# Altium PCB TX_v5.PcbDoc
Units mil, origin at the board's own origin, x right, y up, seen from the top; angles counter-clockwise.
Board outline 1059 x 1910 mil, 2 copper layers (Top Layer, Bottom Layer); 94 components, 52 nets, 247 pads, 44 vias.
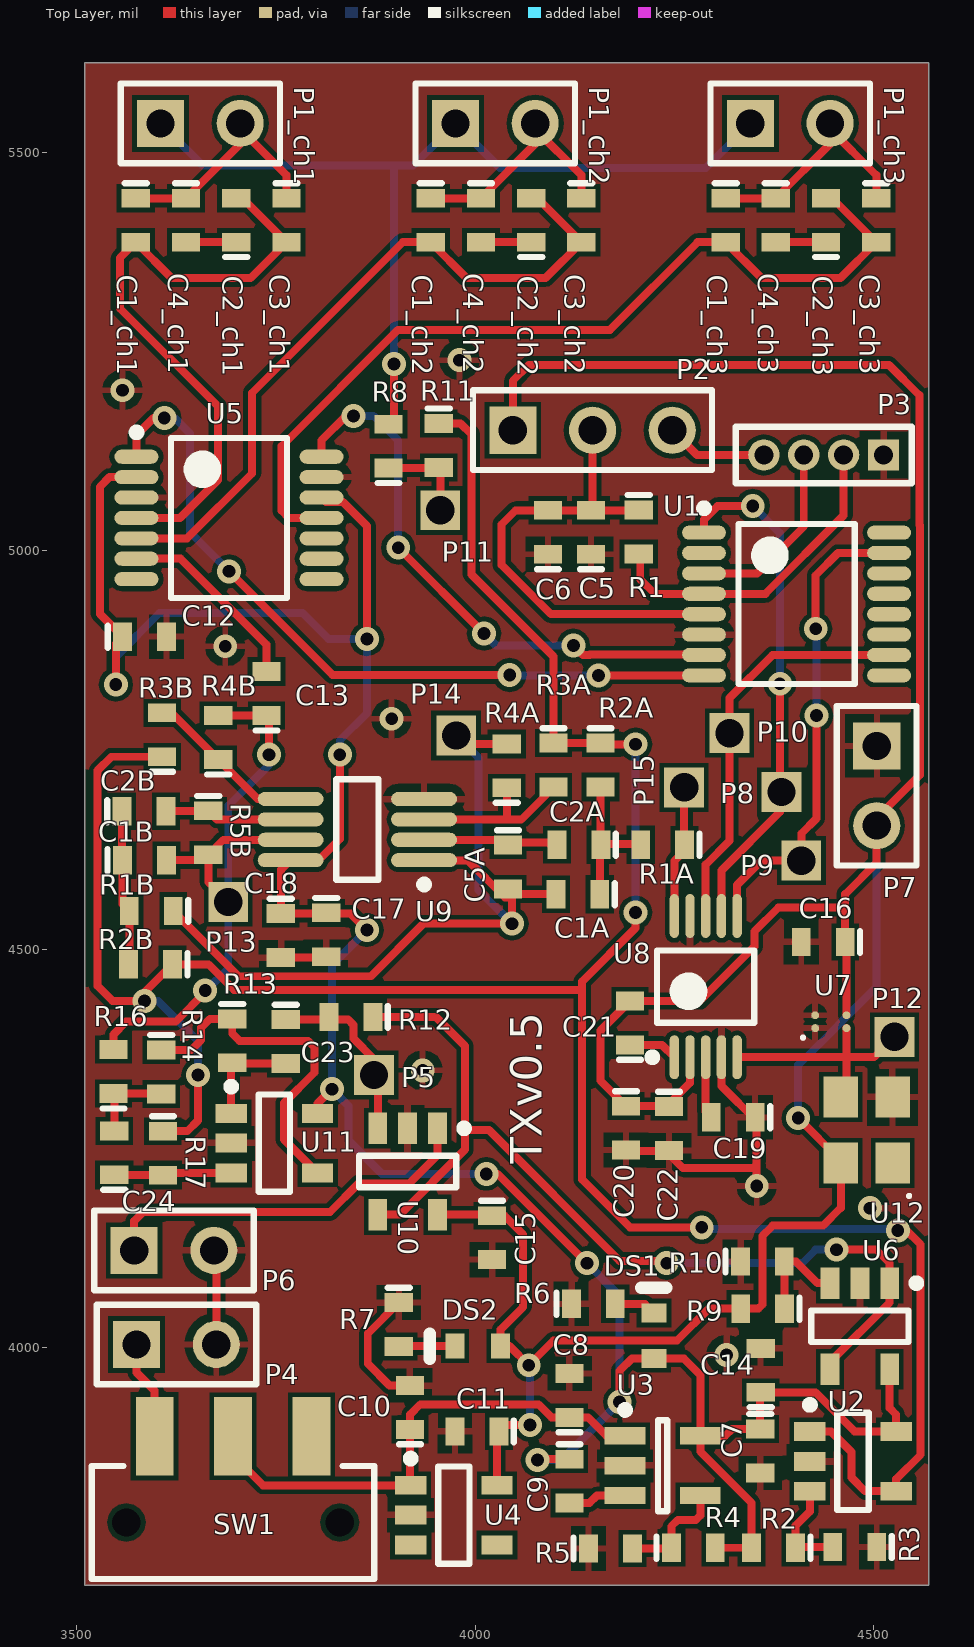
[diagram p0: Top Layer view]
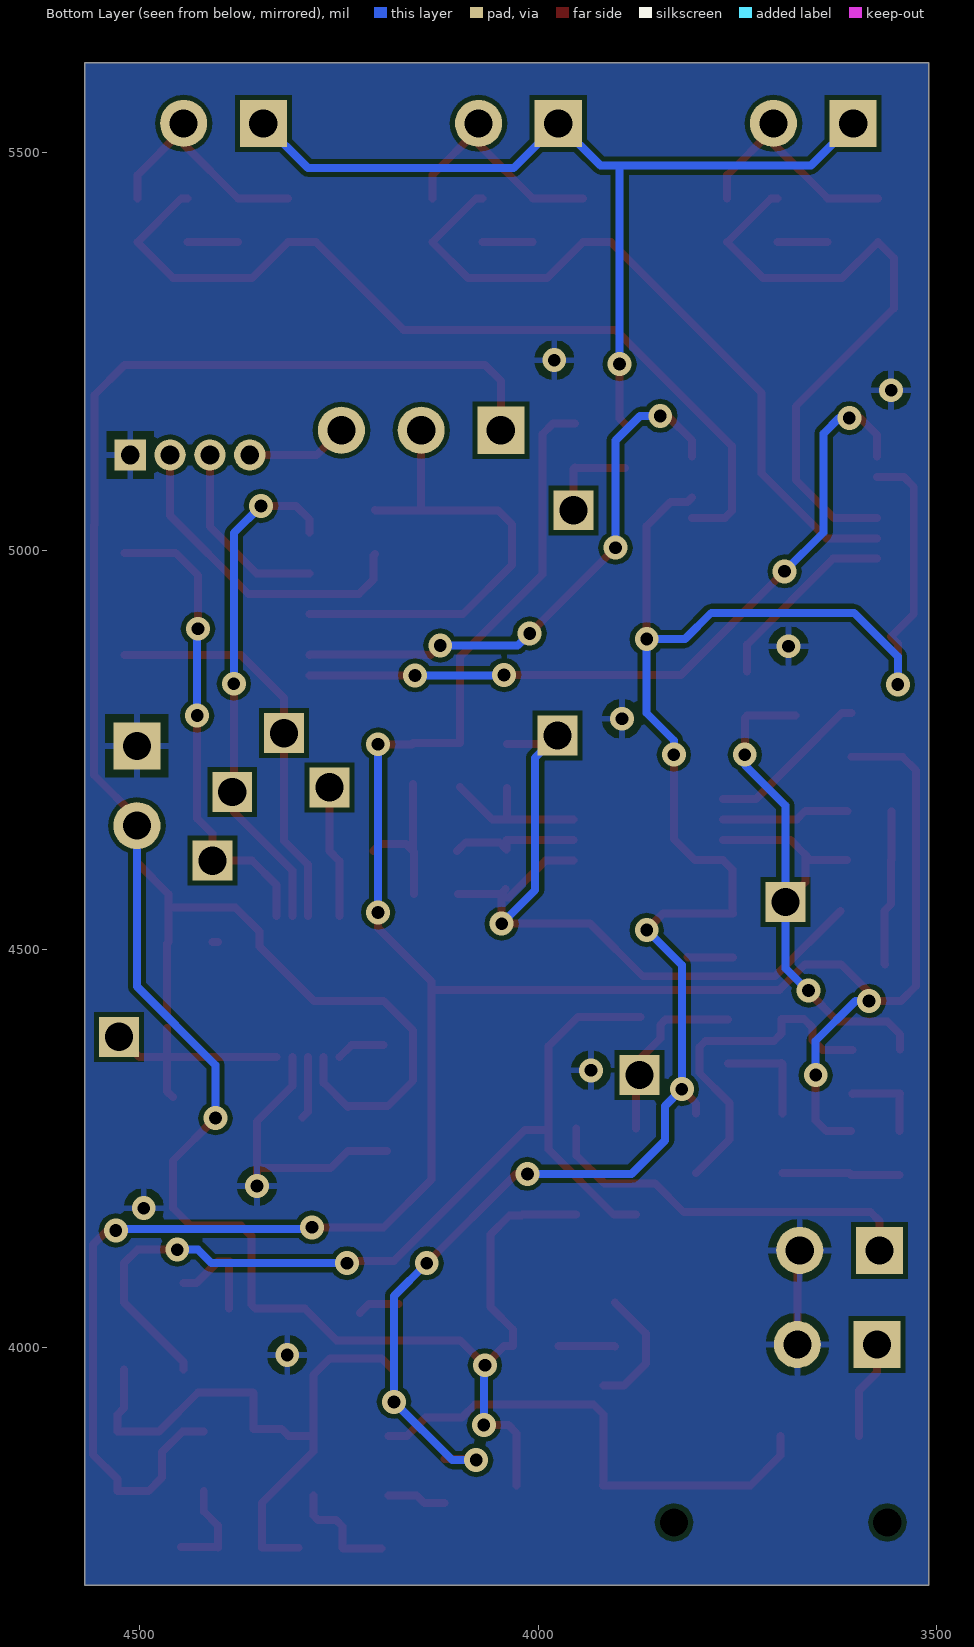
[diagram p1: Bottom Layer view, seen from below]

## Layer stack, top to bottom
Top Solder: solder mask 0.4, Solder Resist, Dk 3.5
Top Layer: signal copper 1.4
Dielectric 1: dielectric 12.6, FR-4, Dk 4.8
Bottom Layer: signal copper 1.4
Bottom Solder: solder mask 0.4, Solder Resist, Dk 3.5

## Board outline
3510,3702 4569,3702 4569,5612 3510,5612

## Design rules (kind name [scope] priority, off if disabled: settings)
Clearance "Clearance~Sunstone Circuits" [All] p1: gap=6 ignorepadtopadclearanceinfootprint=FALSE except(0: Arc-Hole Track-Hole SMDPad-Hole THPad-Hole Via-Hole Fill-Hole Poly-Hole Region-Hole Text-Hole; 5.5: SMDPad-SMDPad) // Sunstone Circuits Minimum Clearance Rule (Double Sided)
HoleSize "HoleSize~Sunstone Circuits" [All] p1: absolutevalues=TRUE maxlimit=251 minlimit=16 maxpercent=80.000 minpercent=20.000 // SSC Hole Size Rule For Single Sided & Double Sided Designs.
HoleSize Testpoint [All] p2: absolutevalues=TRUE maxlimit=100 minlimit=1 maxpercent=80.000 minpercent=20.000
HoleSize TestPointUsage [All] p3: absolutevalues=TRUE maxlimit=100 minlimit=1 maxpercent=80.000 minpercent=20.000
MinimumAnnularRing "MinimumAnnularRing~Sunstone Circuits" [All] p1: minimumring=7 // Sunstone Circuits Minimum Annular Ring (Double Sided)
MinimumSolderMaskSliver [All] p1: minsoldermaskwidth=4
PlaneClearance "PlaneClearance~Sunstone Circuits" [All] p1: clearance=12 // Sunstone Circuits Power Plane Clearance Rule (Double Sided)
PlaneConnect "PlaneConnect~Sunstone Circuits" [All] p1: planeconnectstyle=Relief reliefexpansion=10 reliefentries=4 reliefconductorwidth=8 reliefairgap=10 // Sunstone Circuits Power Plane Connect Rule (Double Sided)
PolygonConnect "PolygonConnect~Sunstone Circuits" [All] p1: connectstyle=Relief reliefconductorwidth=8 reliefentries=4 polygonreliefangle="90 Angle" airgapwidth=10 // Sunstone Circuits Polygon Connect Style (Double Sided)
RoomDefinition ch3 [InComponentClass('ch3')] p1: confinementstyle=ConfineIn formatcopy=TRUE lockcomponents=FALSE outline 4273,5603.95 4273,5287.95 4554,5287.95 4554,5603.95
RoomDefinition ch2 [InComponentClass('ch2')] p2: confinementstyle=ConfineIn formatcopy=TRUE lockcomponents=FALSE outline 3903,5603.95 3903,5287.95 4184,5287.95 4184,5603.95
RoomDefinition ch1 [InComponentClass('ch1')] p3: confinementstyle=ConfineIn formatcopy=TRUE lockcomponents=FALSE outline 3533,5603.95 3533,5287.95 3814,5287.95 3814,5603.95
RoutingVias "RoutingVias~Sunstone Circuits" [All] p1: holewidth=16 width=30 viastyle="Through Hole" minholewidth=16 minwidth=30 maxholewidth=20 maxwidth=40 // Sunstone Circuits Routing Vias Rule (Double Sided)
ShortCircuit "ShortCircuit~Sunstone Circuits" [All] p1: allowed=FALSE // Sunstone Circuits Short Circuit Rule~Do Not Allow (Double Sided)
SolderMaskExpansion "SolderMaskExpansion~Sunstone Circuits" [All] p1: expansion=3 // Sunstone Circuits Solder Mask Expansion Rule (Double Sided)
ViasUnderSMD "ViasUnderSMD~Sunstone Circuits" [All] p1: allowed=FALSE // Sunstone Circuits Vias Under SMD~Do Not Allow (Double Sided)
Width "Width~Sunstone Circuits" [All] p1: maxlimit=100 minlimit=6 preferedwidth=10 // Sunstone Circuits Minimum Width Rule (Double Sided)
25 further rules are at their usual default settings.

## Classes and differential pairs
component class U_phase_reference: C15 C23 C24 P5 P6 R12 R13 R14 R16 R17 U10 U11
component class U_signal_path: C1A C1B C2A C2B C5A C16 C17 C18 C19 C20 C21 C22 P7 P12 P13 P14 P15 R1A R1B R2A R2B R3A R3B R4A R4B R5B U7 U8 U9 U12
component class ch1: C1_ch1 C2_ch1 C3_ch1 C4_ch1 P1_ch1
component class ch2: C1_ch2 C2_ch2 C3_ch2 C4_ch2 P1_ch2
component class ch3: C1_ch3 C2_ch3 C3_ch3 C4_ch3 P1_ch3
channel class coil: ch1 ch2 ch3
component class U_coils: C12 C13 P11 R8 R11 U5
component class U_mcu: C5 C6 P2 P3 P8 P9 P10 R1 U1
component class U_power: C7 C8 C9 C10 C11 C14 DS1 DS2 P4 R2 R3 R4 R5 R6 R7 R9 R10 SW1 U2 U3 U4 U6

## Components (designator, comment, footprint, x,y, rotation, side; value= is the part's Value field where it differs from the comment)
C1_ch1 "Cap" 0603 3574,5414.46 r270 top value=100pF (schematic designator C1)
C1_ch2 "Cap" 0603 3944,5414.46 r270 top value=100pF (schematic designator C1)
C1_ch3 "Cap" 0603 4314,5414.46 r270 top value=100pF (schematic designator C1)
C1A "Cap" 0603 4128.56,4569 r180 top value=160pF
C1B "Cap" 0603 3584.88,4611.61 r0 top value=160pF
C2_ch1 "Cap" 0603 3700,5414.46 r90 top value=100pF (schematic designator C2)
C2_ch2 "Cap" 0603 4070,5414.46 r90 top value=100pF (schematic designator C2)
C2_ch3 "Cap" 0603 4440,5414.46 r90 top value=100pF (schematic designator C2)
C2A "Cap" 0603 4130,4631 r180 top value=160pF
C2B "Cap" 0603 3584.44,4673 r0 top value=160pF
C3_ch1 "Cap" 0603 3763,5414.44 r270 top value=100pF (schematic designator C3)
C3_ch2 "Cap" 0603 4133,5414.44 r270 top value=100pF (schematic designator C3)
C3_ch3 "Cap" 0603 4503,5414.44 r270 top value=100pF (schematic designator C3)
C4_ch1 "Cap" 0603 3637,5414.46 r270 top value=100pF (schematic designator C4)
C4_ch2 "Cap" 0603 4007,5414.46 r270 top value=100pF (schematic designator C4)
C4_ch3 "Cap" 0603 4377,5414.46 r270 top value=100pF (schematic designator C4)
C5 "Cap" 0603 4145,5023 r90 top value=10uF
C5A "Res" 0603 4041,4603 r270 top value=95.3k
C6 "Cap" 0603 4091,5023 r90 top value=.1uF
C7 "Cap" 0603 4357.35,3870.44 r270 top value=0.1uF
C8 "Cap" 0603 4118,3940 r90 top value=1uF
C9 "Cap" 0603 4118,3832.56 r270 top value=0.01uF
C10 "Cap" 0603 3918,3925 r90 top value=1uF
C11 "Cap" 0603 4002,3895 r180 top value=1uF
C12 "Cap" 0603 3585,4892 r0 top value=.1uF
C13 "Cap" 0603 3738,4820.56 r90 top value=DNC
C14 "Cap" 0603 4358,3971.56 r90 top value=0.1uF
C15 "Cap" 0603 4021,4138 r270 top value=.1uF
C16 "Cap" 0603 4436.44,4509 r180 top value=.01uF
C17 "Cap" 0603 3813,4518 r270 top value=10uF
C18 "Cap" 0603 3756,4517 r270 top value=0.1uF
C19 "Cap" 0603 4323.56,4289 r180 top value=100nF
C20 "Cap" 0603 4189,4275.44 r270 top value=10uF
C21 "Cap" 0603 4194,4407.44 r90 top value=.01uF
C22 "Cap" 0603 4243,4275 r270 top value=100nF
C23 "Cap" 0603 3762,4384 r270 top value=1uF
C24 "Cap" 0603 3547,4244.44 r90 top value=33pF
DS1 "TLMS1100-GS08" VISH-TLMX1100_V 4224,4015 r90 top
DS2 "TLMS1100-GS08" VISH-TLMX1100_V 4003,4002 r180 top
P1_ch1 "Header 2" HDR1X2 3605,5535.95 r0 top (schematic designator P1)
P1_ch2 "Header 2" HDR1X2 3975,5535.95 r0 top (schematic designator P1)
P1_ch3 "Header 2" HDR1X2 4345,5535.95 r0 top (schematic designator P1)
P2 "Header 3" HDR1X3 4047,5151 r0 top
P3 "MHDR1X4" MHDR1X4 4512,5120 r180 top
P4 "Header 2" HDR1X2 3575,4004 r0 top
P5 "Socket" socket 3873,4342 r180 top
P6 "Header 2" HDR1X2 3572,4122 r0 top
P7 "Header 2" HDR1X2 4503.56,4755 r270 top
P8 "Socket" socket 4384,4697 r0 top
P9 "Socket" socket 4408.88,4611 r0 top
P10 "Socket" socket 4319,4771 r90 top
P11 "Socket" socket 3956,5050.56 r0 top
P12 "Socket" socket 4526,4390 r90 top
P13 "Socket" socket 3690,4559 r90 top
P14 "Socket" socket 3976,4768 r90 top
P15 "Socket" socket 4262,4703 r90 top
R1 "Res" 0603 4205,5023.44 r270 top value=47k
R1A "Res" 0603 4235,4631 r180 top value=110k
R1B "Res" 0603 3593.44,4548 r180 top value=110k
R2 "Res" 0603 4374.14,3749 r180 top value=100k
R2A "Res" 0603 4157,4731 r270 top value=976
R2B "Res" 0603 3592.56,4481 r180 top value=976
R3 "Res" 0603 4476,3750 r180 top value=100k
R3A "Res" 0603 4098,4731 r270 top value=187
R3B "Res" 0603 3607,4768.93 r90 top value=0
R4 "Res" 0603 4273.44,3749 r0 top value=10k
R4A "Res" 0603 4039.5,4730 r90 top value=11.3k
R4B "Res" 0603 3677.51,4765.44 r90 top value=DNC
R5 "Res" 0603 4169.44,3748 r0 top value=2k
R5B "Res" 0603 3665,4646 r270 top value=97.6k
R6 "Res" 0603 4148,4055 r0 top value=590
R7 "Res" 0603 3904,4029 r270 top value=120
R8 "Res" 0603 3891,5131 r90 top value=0
R9 "Res" 0603 4360.44,4049 r180 top value=100k
R10 "Res" 0603 4360,4108 r0 top value=100k
R11 "Res" 0603 3954,5132 r270 top value=10
R12 "Res" 0603 3844,4415 r180 top value=10k
R13 "Res" 0603 3695,4385 r270 top value=10k
R14 "Res" 0603 3606,4346 r270 top value=10k
R16 "Res" 0603 3546,4346.44 r90 top value=150k
R17 "Res" 0603 3608,4244 r270 top value=100k
SW1 "JS102011SAQN" CKCP-JS102011SAQN-3_V 3696,3834.87 r0 top
U1 "MSP430FR2100 PW" TSOP65P640X120-16N 4403,4933 r0 top
U2 "ADA4622-1ARJZ" SOT95P280X145-5N 4473.87,3857.4 r0 top
U3 "LT1761ES5-BYP" LT-S5-5-TSOT-23_N 4235,3852 r0 top
U4 "TPS709" SOT95P280X145-5N 3973,3790 r0 top
U5 "ADG1604" TSSOP-14 3691,5041 r0 top
U6 "ADA4622-1ARJZ" SOT95P280X145-5N 4482.4,4026.87 r270 top
U7 "SIT8021AI-J4-18S-4.000000E" "SiT8021 - BGA4C100P2X2_154X84X60" 4446,4409 r0 top
U8 "AD9833" MSOP-10 4289,4453 r90 top
U9 "AD8616ARMZ" ADI-RM-8_M 3852,4650 r180 top
U10 "TLV3201-Q1" SOT95P280X145-5N 3915,4221 r270 top
U11 "ADA4622-1ARJZ" SOT95P280X145-5N 3747.87,4256.6 r0 top
U12 "ASE-4.000MHZ-LC-T" DFN165P250X120-4N 4491,4273 r180 top

## Footprints (in the part's own frame and the unit in brackets; to place one, negate y for a bottom-side part, rotate by r counter-clockwise, add the part's x,y. Pads: shape width x height; smd on the part's side, far side on the other; paste and mask are expansions set on the pad)
0603 [mm] "Surface Mount; Body 1.6 x 0.8 mm (LxW typ)"
  rect 0.6x0.9 smd: 1(-0.7,0) 2(0.7,0)
  silkscreen extent -1.17,-0.35 -1.17,0.35, body extent -0.8,-0.4 0.8,0.4, height 0.8
ADI-RM-8_M [mm] "SOP, 8-Leads, Body 3x3mm, Pitch 0.65mm, IPC Low Density"
  oval 2.1x0.45 smd: 1(-2.125,0.975) 2(-2.125,0.325) 3(-2.125,-0.325) 4(-2.125,-0.975) 5(2.125,-0.975) 6(2.125,-0.325) 7(2.125,0.325) 8(2.125,0.975)
  silkscreen extent -2.25,-1.6 0.67,1.87, body extent -1.6,-1.6 1.6,1.6, height 1.1
CKCP-JS102011SAQN-3_V [mm] "SMD, 3-Leads, Body 9x3.6mm, Pitch 2.5mm"
  rect 1.2x2.5 smd: 1(-2.5,1.375) 2(0,1.375) 3(2.5,1.375)
  round 0.6 hole 0.9 unplated: MH1(-3.4,-1.375) MH2(3.4,-1.375)
  silkscreen extent -4.5,-3.17 4.5,0.43, body extent -4.5,-5.18 4.5,2.37, height 3.52
DFN165P250X120-4N [mm] "DFN, 4-Leads, Body 3.20x2.50mm, Pitch 1.65mm, IPC Medium Density"
  rect 1.1x1.3 smd: 1(-0.825,1.05) 2(-0.825,-1.05) 3(0.825,-1.05) 4(0.825,1.05)
  silkscreen extent -1.4,2.05 -1.3,2.15, body extent -1.35,-1.7 1.35,1.7, height 1.2
HDR1X2 [mm] "Connector; Header; 2 Position"
  rect 1.5x1.5 hole 0.9: 1(0,0)
  round 1.5 hole 0.9: 2(2.54,0)
  silkscreen extent -1.27,-1.27 3.81,1.27
HDR1X3 [mm] "Connector; Header; 3 Position"
  rect 1.5x1.5 hole 0.9: 1(0,0)
  round 1.5 hole 0.9: 2(2.54,0) 3(5.08,0)
  silkscreen extent -1.27,-1.27 6.35,1.27
LT-S5-5-TSOT-23_N [mm] "SOT23, 5-Leads, Body 2.90x1.63mm, Pitch 0.95mm, IPC Medium Density"
  rect 1.3x0.55 smd: 1(-1.2,0.95) 2(-1.2,0) 3(-1.2,-0.95) 4(1.2,-0.95) 5(1.2,0.95)
  silkscreen extent -1.32,-1.45 0.15,1.9, body extent -0.87,-1.45 0.87,1.45, height 1
MHDR1X4 [mm] "Connector; Header; 4 Position"
  rect 1x1 hole 0.6: 1(0,0)
  round 1 hole 0.6: 2(1.27,0) 3(2.54,0) 4(3.81,0)
  silkscreen extent -0.9,-0.9 4.71,0.9
MSOP-10 [mm] "TSSOP, 10-Leads, Body 3.00x3.00mm, Pitch 0.50mm, IPC Medium Density"
  oval 1.4x0.3 smd mask+0.048: 1(-2.25,1) 2(-2.25,0.5) 3(-2.25,0) 4(-2.25,-0.5) 5(-2.25,-1) 6(2.25,-1) 7(2.25,-0.5) 8(2.25,0) 9(2.25,0.5) 10(2.25,1)
  silkscreen extent -2.37,-1.55 1.15,1.82, body extent -2.45,-1.55 2.45,1.55, height 1.1
"SiT8021 - BGA4C100P2X2_154X84X60" [mm] "BGA, 4-Leads, Body 1.54x0.84mmx0.60mm, Pitch 1.00mm"
  round 0.25 smd mask+0.05: 1(-0.5,-0.205) 2(0.5,-0.205) 3(0.5,0.205) 4(-0.5,0.205)
  silkscreen extent -0.94,-0.56 -0.84,-0.46, body extent -0.77,-0.66 0.77,0.66, height 0.6
socket [mm]
  rect 1.271x1.271 hole 0.9: 0(0,0)
SOT95P280X145-5N [mm] "SOT23, 5-Leads, Body 2.90x2.80mm, Pitch 0.95mm, IPC Medium Density"
  rect 1x0.6 smd: 1(-1.375,0.95) 2(-1.375,0) 3(-1.375,-0.95) 4(1.375,-0.95) 5(1.375,0.95)
  silkscreen extent -1.5,-1.55 0.5,1.92, body extent -0.88,-1.52 0.87,1.53, height 1.45
TSOP65P640X120-16N [mm] "TSOP, 16-Leads, Body 5.00x4.40mm, Pitch 0.65mm, IPC Medium Density"
  oval 1.4x0.45 smd mask+0.048: 1(-2.95,2.275) 2(-2.95,1.625) 3(-2.95,0.975) 4(-2.95,0.325) 5(-2.95,-0.325) 6(-2.95,-0.975) 7(-2.95,-1.625) 8(-2.95,-2.275) 9(2.95,-2.275) 10(2.95,-1.625) 11(2.95,-0.975) 12(2.95,-0.325) 13(2.95,0.325) 14(2.95,0.975) 15(2.95,1.625) 16(2.95,2.275)
  silkscreen extent -3.07,-2.55 1.85,3.17, body extent -3.2,-2.55 3.2,2.55, height 1.2
TSSOP-14 [mm] "TSOP, 14-Leads, Body 5.00x4.40mm, Pitch 0.65mm, IPC Medium Density"
  oval 1.4x0.45 smd mask+0.048: 1(-2.95,1.95) 2(-2.95,1.3) 3(-2.95,0.65) 4(-2.95,0) 5(-2.95,-0.65) 6(-2.95,-1.3) 7(-2.95,-1.95) 8(2.95,-1.95) 9(2.95,-1.3) 10(2.95,-0.65) 11(2.95,0) 12(2.95,0.65) 13(2.95,1.3) 14(2.95,1.95)
  silkscreen extent -3.07,-2.55 1.85,2.85, body extent -3.2,-2.55 3.2,2.55, height 1.2
VISH-TLMX1100_V [mm] "SMD, 2-Leads, Body 1.6x0.8mm"
  rect 0.6x0.8 smd: 1(-0.725,0) 2(0.725,0)
  silkscreen extent 1.53,-0.4 1.53,0.4, body extent -0.8,-0.4 0.8,0.4, height 0.65

## Part data
C1_ch1 C1_ch2 C1_ch3 C1A C1B C2_ch1 C2_ch2 C2_ch3 C2A C2B C3_ch1 C3_ch2 C3_ch3 C4_ch1 C4_ch2 C4_ch3 C5 C6 C7 C8 C9 C10 C11 C12 C13 C14 C15 C16 C17 C18 C19 C20 C21 C22 C23 C24: "Ceramic Capacitor (Surface Mount)", Manufacturer="Generic Ceramic Chip Cap (TBD)"
C5A R1 R1A R1B R2 R2A R2B R3 R3A R3B R4 R4A R4B R5 R5B R6 R7 R8 R9 R10 R11 R12 R13 R14 R16 R17: "Chip Resistor (Surface Mount)", Manufacturer="Generic Chip Res (TBD)"
DS1 DS2: library part CMP-1666-00027-1, "LED, RED, 2.1 V, -40 to 100 degC, 2-Pin SMD (0603), RoHS, Tape and Reel", Capacitance="12 pF", Case/Package=0603, Case Code (Metric)=1608, Max Operating Temperature=125degC, Min Operating Temperature=-55degC, Package Quantity=4000, Resistance="100000000000 Ohm", Tolerance=5%, Type (Capacitors)=C0G, Voltage Rating="50 V", Case Code (Imperial)=0603, ComponentLink1Description="Manufacturer URL", ComponentLink1URL=http://www.vishay.com/, ComponentLink2Description=Datasheet, ComponentLink2URL=http://www.vishay.com/docs/83173/tlmb1100.pdf, DatasheetVersion="Rev. 2.7, 03/2016", Height="0.8 mm", Length="1.6 mm", Mount="Surface Mount", PackageDescription="2-Pin Surface Mount Device, Body 1.6 x 0.8 mm", PackageReference=TLMX1100, Packaging="Tape and Reel", Pins=2, Radiation Hardening=No, REACH SVHC="No SVHC", RoHSCompliant=True, Voltage Rating (DC)="50 V", Width="0.8 mm"
P1_ch1 P1_ch2 P1_ch3 P4 P6 P7: "Header, 2-Pin", LatestRevisionDate=17-Jul-2002, LatestRevisionNote="Re-released for DXP Platform.", Publisher="Altium Limited"
P2: "Header, 3-Pin", LatestRevisionDate=17-Jul-2002, LatestRevisionNote="Re-released for DXP Platform.", Publisher="Altium Limited"
P3: "Header, 4-Pin", Supplier Part Number 1=ED90528-ND, LatestRevisionDate=17-Jul-2002, LatestRevisionNote="Re-released for DXP Platform.", Publisher="Altium Limited", Supplier 1=Digi-Key
SW1: library part CMP-2000-06501-1, "Sub-Miniature Slide Switch, SPDT, -40 to 85 degC, 3-Pin SMD, RoHS, Tape and Reel", Actuator Color=Black, Contact Rating @ Voltage=0.3@6VDCA, Dielectric Strength=500VAC, Manufacturer="C&K Components", Maximum AC Voltage Rating=N/A, Maximum Contact Resistance=70mOhm, Maximum DC Voltage Rating=6V, Minimum Insulation Resistance=100MOhm, Operating Temperature=-40to85C, Package Description="3-Pin Surface Mount Device, Body 9 x 3.6 mm, Height 3.5 mm", Package Reference=SMT, Actuator Material=Nylon4/6, Actuator Style=SideSlide, Base Material=N/A, Body Orientation=RightAngle, Contact Material=CopperAlloy, Contact Plating=Silver, COO=US, Datasheet URL=https://datasheet.ciiva.com/1532/js-9dec14-1532400.pdf, Datasheet Version=12/2014, Dimension=9x4.3mm, ECCN=EAR99, Electrical Life=15000Cycles, Family=JS, Housing Material=Nylon4/6, HTS=8536509050, Manufacturer URL=http://www.ckswitches.com/, Mechanical Life=N/A, Mounting=SurfaceMount,GullWing, Mounting Technology=SurfaceMount, Packaging=TapeandReel, Part No=JS102011SAQN, Pole Throw Configuration=SPDT, Product Weight=N/A, RoHS=Yes, Seal Description=N/A, Seal Location=N/A, Supplier=C&KComponents, Switch Configuration=N/A, Type=Sub-Miniature
U1: Supplier Part Number 1=296-48936-1-ND, ComponentLink1Description=Datasheet, ComponentLink1URL=http://www.ti.com/lit/ds/symlink/msp430fr2100.pdf, ComponentLink2Description=DigiKey, ComponentLink2URL=https://www.digikey.com/product-detail/en/texas-instruments/MSP430FR2100IPW16R/296-48936-1-ND/8634999, Supplier 1=Digi-Key
U2 U6 U11: "30 V, 8 MHz, Low Bias Current, / Single-Supply, RRO, Precision Op Amps", Supplier Part Number 1=ADA4622-1ARJZ-R7CT-ND, ComponentLink1Description=Datasheet, ComponentLink1URL=http://www.analog.com/media/en/technical-documentation/data-sheets/ada4622-1-4622-2-4622-4.pdf, Supplier 1=Digi-Key
U3: library part CMP-0476-01245-1, "100 mA, Low Noise, LDO Micropower Regulator, 1.8 to 20 V Vin, Adjustable Vout, 5-pin SOT23 (S5-5), -40 to 125 degC", Dropout Voltage(V)=0.3, Manufacturer="Linear Technology", Output Voltage=Adj, Shutdown Current(uA)=1, Supplier Part Number 1=LT1761ES5-BYP#TRPBFCT-ND, Code_JEDEC=MO-193, ComponentLink1Description="Manufacturer URL", ComponentLink1URL=http://www.linear.com/, ComponentLink2Description=Datasheet, ComponentLink2URL=http://cds.linear.com/docs/en/datasheet/1761sff.pdf, ComponentLink3Description="Package Specification", ComponentLink3URL=http://cds.linear.com/docs/en/packaging/SOT_5_05-08-1635.pdf, DatasheetVersion="Rev. F", Discrete Pass Element=no, Iout(mA)=100, Isupply(mA)=0.02, Mounting Technology="Surface Mount", Noise(uV)=20, Number of Outputs=1, PackageDescription="5-Pin Plastic TSOT-23, Body 1.63 x 2.90 mm, Pitch 0.95 mm", PackageReference=S5-5, PackageVersion=Jun-10, PartNumber=LT1761ES5-BYP, PSRR(dB)=65, RoHS=FALSE, Supplier 1=Digi-Key, Supplier 2=Digi-Key, Supplier 3=Mouser, Supplier Part Number 2=LT1761ES5-BYP#TRPBFDKR-ND, Supplier Part Number 3=584-1761ES5-BYPTRPBF, Vin Max(V)=20, Vin Min(V)=1.8, Vout Max(V)=20, Vout Min(V)=1.22
U4: library part TPS70933, "3.3V Ultra low power Voltage Regulator", Supplier Part Number 1=296-39474-1-ND, Supplier 1=Digi-Key
U5: Supplier Part Number 1=ADG1604BRUZ-ND, Supplier 1=Digi-Key
U7: "4 MHz low power oscillator", Supplier Part Number 1=1473-1353-1-ND, Supplier 1=Digi-Key
U8: "MSOP-10", Supplier Part Number 1=AD9833BRMZ-ND, Supplier 1=Digi-Key
U9: library part CMP-0384-01709-1, "Double Channel Wide Bandwidth Operational Amplifier, 24 MHz BW, 12 V/us SR, Industrial, 8-pin SOP (RM-8), Tube", Amplifiers Per Package=2, Generic Part Number=AD8616, Input Bias Current=200fA, Input Offset Voltage=23uV, Manufacturer="Analog Devices", Code_JEDEC=MO-187-AA, ComponentLink1Description="Manufacturer URL", ComponentLink1URL=http://www.analog.com/en/index.html, ComponentLink2Description=Datasheet, ComponentLink2URL=http://www.analog.com/static/imported-files/data_sheets/AD8615_8616_8618.pdf, ComponentLink3Description="Package Specification", ComponentLink3URL=http://www.analog.com/static/imported-files/packages/PKG_PDF/MSOP%28RM%29/RM_8.pdf, DatasheetVersion="Rev. E", Iq/Amp=2mA, Mounting Technology="Surface Mount", PackageDescription="8-Pin Mini Small Outline Package, Body 3 x 3 mm, Pitch 0.65 mm", PackageReference=RM-8, PartId=1, PartNumber=AD8616ARMZ, Slew Rate=12V/us, Small Signal Bandwidth=24MHz, V Span Max=6V, V Span Min=2.7V
U10: "40-ns, Micropower Comparator", Supplier Part Number 1=296-36750-1-ND, Supplier 1=Digi-Key
U12: "4 MHz SMD Oscillator", Supplier Part Number 1=535-9556-6-ND, Supplier 1=Digi-Key

## Via types
v1: diameter 30, hole 16, Top Layer to Bottom Layer, 44 vias

## Nets (pads, with @x,y where several pads share a name; then routed paths per layer and width w, separated by ;. In a path a pad name is that pad's centre, name@x,y a point inside that pad or via, vN(x,y) a via of type N, cw(c..) or ccw(c..) an arc to the next point about the centre after c; other vN are vias at no path point)
1.65V: R12.1 U6.1 U6.4 U10.4 | length 1184.2
  Top Layer w10: R12.1 3950.48,4415 3987,4378.48 3987,4273 ; U10.4 3905.35,4166.87 3987,4248.52 3987,4273 ; v1(4240,4106) 4237,4109 4181,4109 4017,4273 3987,4273 ; U6.4 4445,3982 4519.8,4056.8 U6.1 4519.8,4106.2 4503,4123 v1(4453,4123)
  Bottom Layer w10: v1(4240,4106) 4410,4106 4427,4123 v1(4453,4123)
4V: R2A.1 R2B.1 R3A.1 R3B.1 R11.1 R17.1 U2.1 U2.4 | length 3344.3
  Top Layer w10: R3B.1 3543.37,4741.37 3526,4724 3526,4454 3545,4435 v1(3585,4435) 3585,4445.88 R2B.1 3665.37,4481 3697.37,4449 4134,4449 ; R17.1 3638.56,4271.56 3652,4285 v1(3652,4342) ; R11.1 3981.44,5159.56 3995,5146 3995,4970 4098,4867 R3A.1 R2A.1 4158.56,4757 v1(4201,4757) ; v1(4201,4546) 4201,4526.44 4134,4459.44 4134,4449 ; v1(4284,4151) 4194,4151 4134,4211 4134,4449 ; U2.1 4446.2,3894.8 4472,3869 4472,3837 4489,3820 U2.4 4528,3835.12 4558.69,3865.8 4558.69,4129.31 4539,4149 4537,4147 v1(4530,4147)
  Bottom Layer w10: v1(3585,4435) 3602,4435 3652,4385 v1(3652,4342) ; v1(4201,4546) v1(4201,4757) ; v1(4284,4151) 4286,4149 4528,4149 v1(4530,4147)
8V: C7.1 C9.1 C12.1 C14.1 C17.1 C18.1 DS1.1 R2.2 R4.2 U2.5 U3.5 U5.2 U5.12 U6.5 U9.8 U11.5 | length 3344.6
  Top Layer w10: v1(3549,4832) 3549,4883.56 C12.1 3529,4920.44 3529,5080 3541.18,5092.18 U5.2 ; C18.1@3755.44,4545.56 3755.44,4544.56 3756.44,4545.56 3756.44,4599.72 U9.8 3803.31,4611.61 3830,4638.3 v1(3830,4744) ; C18.1 3843.44,4544.56 v1(3864,4524) ; U11.5 3802,4306.37 v1(3820,4324.37) ; U5.12 3812.87,5060.86 3834.07,5060.86 3864,5030.93 v1(3864,4889) ; v1(4013.73,4218) 4028,4218 v1(4140,4106) ; v1(4078,3859) 4078,3860 4078.12,3860.12 C9.1 ; v1(4181,3932) 4181,3971 4196.46,3986.46 DS1.1 4261.54,3986.46 4282.24,3965.76 U3.5 ; R4.2 R2.2 4346.58,3805.42 4282.24,3869.76 U3.5 ; U6.5 4519.8,3924.2 4528,3916 U2.5 4475.88,3894.8 4426.68,3944 C14.1 4357.35,3943.35 C7.1 4322,3898 4313.4,3889.4 U3.5
  Bottom Layer w10: v1(3549,4832) 3549,4867 3604,4922 3783,4922 3816,4889 v1(3864,4889) 3864,4796 3830,4762 v1(3830,4744) v1@3830,4738.63 ; v1(3864,4524) 3820,4480 v1(3820,4324.37) 3841,4303.37 3841,4260 3883,4218 v1(4013.73,4218) ; v1(4078,3859) 4108,3859 v1(4181,3932) 4181,4065 v1(4140,4106)
GND: C5.1 C6.1 C7.2 C8.2 C10.2 C11.2 C12.2 C14.2 C15.2 C16.2 C17.2 C18.2 C19.1 C20.2 C22.2 P3.1 P4.2 P6.2 P7.1 R3.1 R5.1 R6.1 R7.1 R10.1 U1.6 U2.2 U3.2 U4.2 U5.3 U5.13 U6.2 U7.1 U7.4 U8.4 U8.9 U9.4 U10.2 U11.2 U12.2 | length 692.4
  Top Layer w10: P6.2 3675,4119 P4.2 ; C18.2 3812,4489.44 C17.2 ; R7.1 3865,4017.56 3865,3980 3892.44,3952.56 C10.2 ; C20.2@4190,4246.88 4239,4246.88 4260.65,4225.23 4348.23,4225.23 4353,4230 v1(4353,4203) ; U8.4 4308.69,4328.31 4353,4284 4353,4232.43 ; C16.2@4401.55,4509 C16.2
  other v1: 4315,3990.78 4494.97,4175 3933.97,4348 3894.97,4789 3686.22,4880 3557.37,5201.22 3979.97,5238.86
MCLK: P12.0 U7.2 U8.5 U12.3 | length 297.8
  Top Layer w10: U8.5 4465.69,4364.42 ; U12.3 4465.69,4321.5 4465.69,4364.42 ; U7.2 4465.69,4364.42 ; P12.0 4500.42,4364.42 4465.69,4364.42
MOSI: P9.0 U1.15 U8.6 | length 602
  Top Layer w10: U8.6 4328.37,4580.37 4359,4611 P9.0 4408.88,4644.88 4428,4664 v1(4428,4793) ; v1(4427,4902) 4427,4969 4454.98,4996.98 U1.15
  Bottom Layer w10: v1(4427,4902) 4428,4901 v1(4428,4793)
MuxA: U1.8 U5.1 | length 963.5
  Top Layer w10: U5.1 3574.86,5144.86 3596.22,5166.22 v1(3609.81,5166.22) v1@3609.81,5171.19 ; v1@3688,4977 v1(3691,4974) 3821,4844 v1(4043,4844) ; v1(4154.57,4843.43) U1.8
  Bottom Layer w10: v1(3609.81,5166.22) 3622.78,5166.22 3642,5147 3642,5023 v1(3691,4974) ; v1(4043,4844) 4043.57,4843.43 v1(4154.57,4843.43)
MuxB: U1.7 U5.14 | length 716.4
  Top Layer w10: U5.14 3807.14,5138.32 3837.82,5169 v1(3847,5169) ; v1(3903.22,5003.65) v1(4010.86,4896) ; v1(4123,4881) 4134.98,4869.02 4143.39,4869.02 4143.8,4869.43 4286.45,4869.43 U1.7
  Bottom Layer w10: v1(3847,5169) 3872.43,5169 3903.22,5138.22 v1(3903.22,5003.65) ; v1(4010.86,4896) 4025.86,4881 v1(4123,4881)
NetC1_ch1_1: C1_ch1.1 C3_ch1.1 C4_ch1.1 P1_ch1.2 | length 296.1
  Top Layer w10: C1_ch1.1 C4_ch1.1 3705,5510.02 P1_ch1.2@3705,5529 ; P1_ch1.2 P1_ch1.2@3705,5529 ; C3_ch1.1 3763,5471 P1_ch1.2@3705,5529
NetC1_ch1_2: C1_ch1.2 C2_ch1.2 C3_ch1.2 U5.4 | length 791.4
  Top Layer w10: U5.4 3629.3,5041 3677,5088.7 3677,5181 3554,5304 3554,5366.91 C1_ch1.2 3618.91,5342 3718.12,5342 C3_ch1.2 3707.86,5442.02 C2_ch1.2
NetC1_ch2_1: C1_ch2.1 C3_ch2.1 C4_ch2.1 P1_ch2.2 | length 296.1
  Top Layer w10: C1_ch2.1 C4_ch2.1 4075,5510.02 P1_ch2.2@4075,5529 ; P1_ch2.2 P1_ch2.2@4075,5529 ; C3_ch2.1 4133,5471 P1_ch2.2@4075,5529
NetC1_ch2_2: C1_ch2.2 C2_ch2.2 C3_ch2.2 U5.5 | length 894.2
  Top Layer w10: U5.5 3638.41,5015.41 3720,5097 3720,5198 3908.91,5386.91 C1_ch2.2 3988.91,5342 4088.12,5342 C3_ch2.2 4077.86,5442.02 C2_ch2.2
NetC1_ch3_1: C1_ch3.1 C3_ch3.1 C4_ch3.1 P1_ch3.2 | length 296.1
  Top Layer w10: C1_ch3.1 C4_ch3.1 4445,5510.02 P1_ch3.2@4445,5529 ; P1_ch3.2 P1_ch3.2@4445,5529 ; C3_ch3.1 4503,5471 P1_ch3.2@4445,5529
NetC1_ch3_2: C1_ch3.2 C2_ch3.2 C3_ch3.2 U5.11 | length 1109.9
  Top Layer w10: U5.11 3766,5041 3757,5050 3757,5131 3903,5277 4169,5277 4278.91,5386.91 C1_ch3.2 4358.91,5342 4458.12,5342 C3_ch3.2 4447.86,5442.02 C2_ch3.2
NetC1A_1: C1A.1 C2A.1 R1A.2 R2A.2 | length 195.6
  Top Layer w10: C1A.1 4156.12,4622 C2A.1@4157.12,4623 ; R2A.2@4157.12,4707 C2A.1@4157.12,4623 ; R1A.2@4206.88,4623 4197.88,4632 4166.12,4632 C2A.1@4157.12,4623
NetC1B_1: C1B.1 C2B.1 R1B.2 R2B.2 | length 196.1
  Top Layer w10: C2B.1 3556.88,4612.06 C1B.1 3557.32,4556.56 R1B.2 3565.88,4481.88 R2B.2
NetC2_ch1_1: C2_ch1.1 C4_ch1.2 | length 63
  Top Layer w10: C4_ch1.2 C2_ch1.1
NetC2_ch2_1: C2_ch2.1 C4_ch2.2 | length 63
  Top Layer w10: C4_ch2.2 C2_ch2.1
NetC2_ch3_1: C2_ch3.1 C4_ch3.2 | length 63
  Top Layer w10: C4_ch3.2 C2_ch3.1
NetC2A_2: C2A.2 C5A.1 U9.2 | length 166
  Top Layer w10: U9.2@3955.94,4636.79 4040,4636.79 4040,4625.12 4048.88,4634 4091,4634 C2A.2@4102,4623
NetC2B_2: C2B.2 R5B.1 U9.6 | length 161
  Top Layer w10: C2B.2 3612.56,4673.56 R5B.1 3675.76,4662.8 U9.6
NetC9_2: C9.2 U3.3 | length 73.7
  Top Layer w10: C9.2 4143,3805 4152.6,3814.6 U3.3
NetC13_2: C13.2 U5.6 | length 241.7
  Top Layer w10: U5.6 3630.18,4989.82 3738,4882 C13.2
NetC19_2: C19.2 U8.3 | length 78.3
  Top Layer w10: U8.3 4289,4296 C19.2
NetC21_1: C21.1 U8.1 | length 62
  Top Layer w10: C21.1 4234.17,4379.88 U8.1
NetC23_1: C23.1 P5.0 R12.2 U10.3 | length 230.3
  Top Layer w10: C23.1 3840.44,4411.56 3847,4405 3847,4388 3873,4362 P5.0 3877.6,4337.4 U10.3
NetC23_2: C23.2 R13.2 U11.1 | length 131.4
  Top Layer w10: U11.1 3693.73,4356.17 R13.2 3696,4356.44 C23.2
NetC24_1: C24.1 R17.2 U11.3 | length 147.7
  Top Layer w10: C24.1 3607.56,4216.88 3609.87,4219.2 U11.3
NetC24_2: C24.2 R14.2 R16.1 | length 107.5
  Top Layer w10: C24.2 3547,4317.88 R16.1 3605.56,4318.88 R14.2
NetDS1_2: DS1.2 R6.2 | length 53.2
  Top Layer w10: R6.2 4212.54,4055 DS1.2
NetDS2_2: DS2.2 R7.2 | length 70.7
  Top Layer w10: R7.2 3904.56,4002 DS2.2
NetP4_1: P4.1 SW1.1 | length 124.4
  Top Layer w10: P4.1 3575,3969 3597.57,3946.43 SW1.1
NetP6_1: P6.1 U10.1 | length 485.3
  Top Layer w10: P6.1 3572,4159 3583,4170 3817.44,4170 3853.44,4206 3917,4206 3952.4,4241.4 U10.1
NetP11_0: P11.0 R8.1 R11.2 | length 118.1
  Top Layer w10: R8.1 3953,5103.44 R11.2 3956,5102.44 P11.0
NetR2_1: R2.1 R3.2 U2.3 | length 125.6
  Top Layer w10: U2.3 4419.73,3794.73 4401.7,3776.7 R2.1 4402.7,3750 R3.2
NetR3A_2: R3A.2 R4A.1 U9.3 | length 200.3
  Top Layer w10: U9.3@3955.94,4662.38 4041,4662.38 ; R4A.1 4039.5,4663.88 4041,4662.38 ; R3A.2 4098.28,4703.16 4057.5,4662.38 4041,4662.38
NetR3B_2: R3B.2 R4B.1 U9.5 | length 206.1
  Top Layer w10: R3B.2 3618.91,4796.49 R4B.1 3727.01,4688.39 U9.5
NetR4_1: R4.1 R5.2 U3.4 | length 143.1
  Top Layer w10: R5.2 4244.88,3748 R4.1 4245.88,3775.88 4254,3784 4276.49,3784 4282.24,3789.75 U3.4
NetR9_1: R9.1 R10.2 U6.3 | length 127.8
  Top Layer w10: R9.1 4388,4107.56 R10.2 4402,4108 4429,4081 U6.3
NetR13_1: R13.1 R14.1 U11.4 | length 433.8
  Top Layer w10: R14.1 3643.56,4373.56 3656,4386 3656,4401.56 3667,4412.56 R13.1 3695,4394 3704,4385 3790,4385 3798,4377 3798,4345 3760,4307 3760,4261.2 U11.4
RST: P3.2 R1.2 U1.4 | length 412
  Top Layer w10: R1.2 4206.88,4994 4206.88,4963.91 4225,4945.8 U1.4 4363.8,4945.8 4462,5044 P3.2
SCLK: P8.0 U1.1 U8.7 | length 643.4
  Top Layer w10: U1.1 4286.86,5038.86 4304,5056 v1(4348,5056) ; U8.7 4308.69,4598.69 4382,4672 v1(4382,4833)
  Bottom Layer w10: v1(4348,5056) 4382,5022 v1(4382,4833)
SIG_8V: C1B.2 C13.1 P13.0 R4B.2 R5B.2 R16.2 U9.7 | length 837.5
  Top Layer w10: R16.2 3546,4393 3562,4409 3624,4409 3663,4448 v1(3661,4448) ; C1B.2 3658.17,4611.61 R5B.2 ; R4B.2 C13.1 3741,4790 v1(3741,4744) ; P13.0 3665,4584 R5B.2 ; U9.7 3683.76,4637.2 R5B.2
  Bottom Layer w10: v1(3661,4448) 3662,4448 3690,4476 P13.0 3690,4680 3741,4731 v1(3741,4744)
SIG_F1: C1A.2 C5A.2 P14.0 R1B.1 R4A.2 U9.1 | length 1028.8
  Top Layer w10: R1B.1 3703,4466 3869,4466 3935,4532 v1(4046,4532) C5A.2@4046,4565 ; U9.1@3955.94,4611.2 3990.8,4611.2 4037,4565 C5A.2@4046,4565 ; P14.0 3986.44,4757.56 R4A.2 ; C5A.2 4046,4570.44 C5A.2@4046,4569 ; C1A.2 C5A.2@4046,4569 ; C5A.2@4046,4565 C5A.2@4046,4569
  Bottom Layer w10: P14.0 4004,4740 4004,4574 v1(4046,4532)
SIG_SQ: P15.0 R1A.1 U8.10 | length 151.5
  Top Layer w10: U8.10 4249.63,4610.63 4262,4623 P15.0@4262,4688
SS: P10.0 U1.10 U8.8 | length 508.4
  Top Layer w10: U8.8 4289,4606 4319,4636 P10.0 4319,4815 4373.02,4869.02 U1.10
TEST: P3.3 U1.3 | length 239.4
  Top Layer w10: U1.3 4353.39,4971.39 4412,5030 P3.3
VBATT: C8.1 C10.1 SW1.2 U3.1 U4.1 | length 642.9
  Top Layer w10: SW1.2 3696,3865 3733.6,3827.4 U4.1 3918,3828.27 C10.1 3918,3916 3931,3929 4079.18,3929 4095.74,3912.44 C8.1 4141.56,3912.44 4164.6,3889.4 U3.1
VCC: C11.1 C15.1 C16.1 C20.1 C21.2 C22.1 DS2.1 P2.1 P7.2 R9.2 U4.5 U7.3 U8.2 U10.5 U12.4 | length 3595.6
  Top Layer w10: U10.5 4019.69,4166.87 C15.1 4036.44,4165.56 4060,4142 4060,4051 4031.54,4022.54 DS2.1 4043,4002 v1(4067,3978) 4098.27,4009.27 4253.27,4009.27 4293,4049 R9.2 4355,4049 4360,4054 4360,4140 4373,4153 4436,4153 4458.52,4175.52 U12.4 4458.52,4234.48 v1(4405,4288) ; U4.5 4027.13,3892.57 C11.1 4037.56,3903 v1(4068.41,3903) ; P2.1 4047,5213 4067,5233 4519,5233 4557,5195 4557,5032.19 4557.7,5031.49 4557.7,4718.7 4503.56,4664.56 P7.2 4503.56,4608.56 4464,4569 C16.1 4465.69,4507.32 U7.3 ; U8.2 4269.31,4332.31 4239,4302 4238,4303 C20.1 4157,4335 4157,4398 C21.2 4281.49,4435 4349.96,4503.47 4349.96,4521.96 4380,4552 4463,4552
  Bottom Layer w10: v1(4067,3978) 4068.41,3976.59 v1(4068.41,3903) ; v1(4405,4288) 4405,4354.44 4503.56,4453 P7.2
VDBG: P2.3 P3.4 | length 127.8
  Top Layer w10: P2.3 4278,5120 P3.4
VMSP: C5.2 C6.2 P2.2 R1.1 U1.5 | length 611.2
  Top Layer w10: P2.2 4147,5052.56 C5.2 ; R1.1 4204.56,5050.56 C5.2 ; U1.5 4094.8,4920.2 4033,4982 4033,5033 4050.56,5050.56 C6.2 C5.2
wave_out: P1_ch1.1 P1_ch2.1 P1_ch3.1 R8.2 | length 1156.6
  Top Layer w10: R8.2 3898,5165.56 v1(3898,5234)
  Bottom Layer w10: P1_ch1.1 3657.95,5483 3922.05,5483 P1_ch2.1 4030.95,5480 4289.05,5480 P1_ch3.1 ; v1(3898,5234) 3898,5482
pads on no net: SW1.3 SW1.MH1 SW1.MH2 U1.2 U1.9 U1.11 U1.12 U1.13 U1.14 U1.16 U4.3 U4.4 U5.7 U5.8 U5.9 U5.10 U12.1

## Polygon pours and split planes (outlines as drawn)
GND on Bottom Layer "GND Plan" (solid, pour order 2): 3510,3702 3510,5612 4569,5612 4569,3702
GND on Top Layer "GND Plan" (solid, pour order 0): 3510,5612 4569,5612 4569,3702 3510,3702

## Silkscreen, mask and mechanical layers (free items; w line width, h text height)
Top Overlay:
  text "TXv0.5" at 4083,4231 h40 r90
Mechanical 1:
  the board outline again, w10